# Altium PCB Volta-Interface.PcbDoc (part 1 of 2)
Units mm, origin at the board's own origin, x right, y up, seen from the top; angles counter-clockwise.
Board outline 90 x 25.5 mm, 4 copper layers (Top Layer, PWR, GND, Bottom Layer), stack 0.97 mm thick; 63 components, 43 nets, 229 pads, 83 vias.
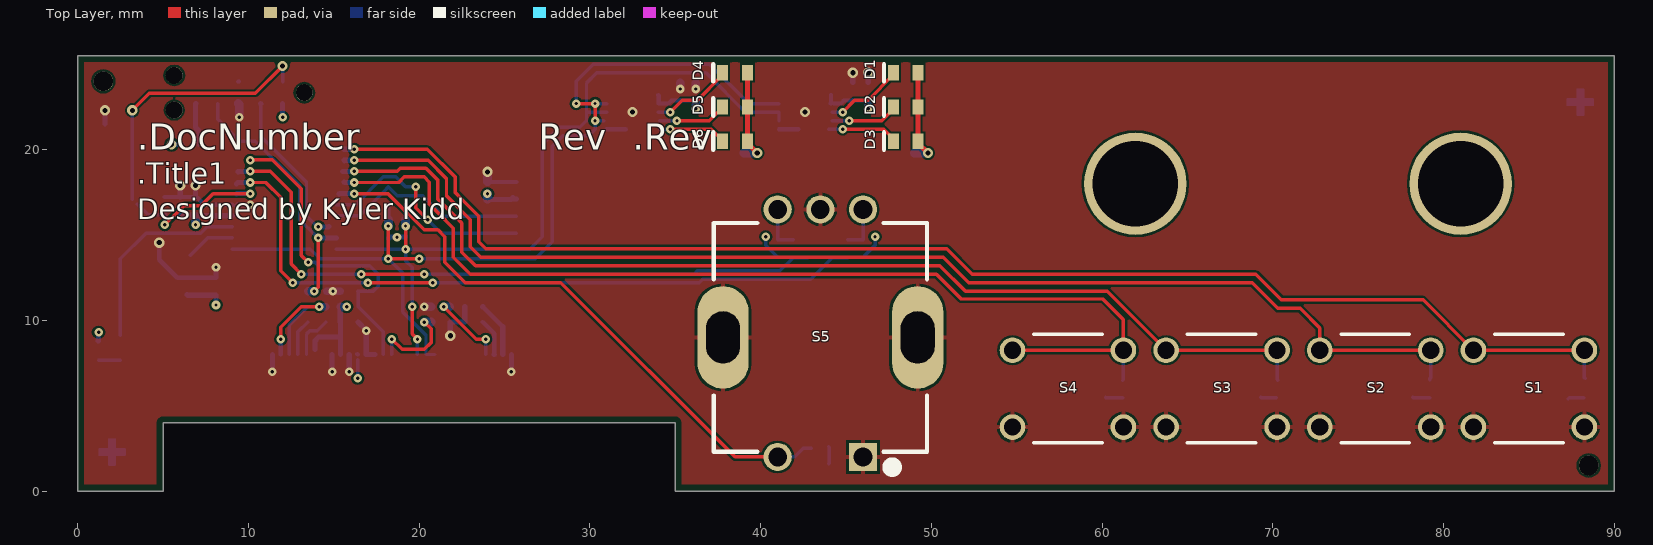
[diagram p0: Top Layer view]
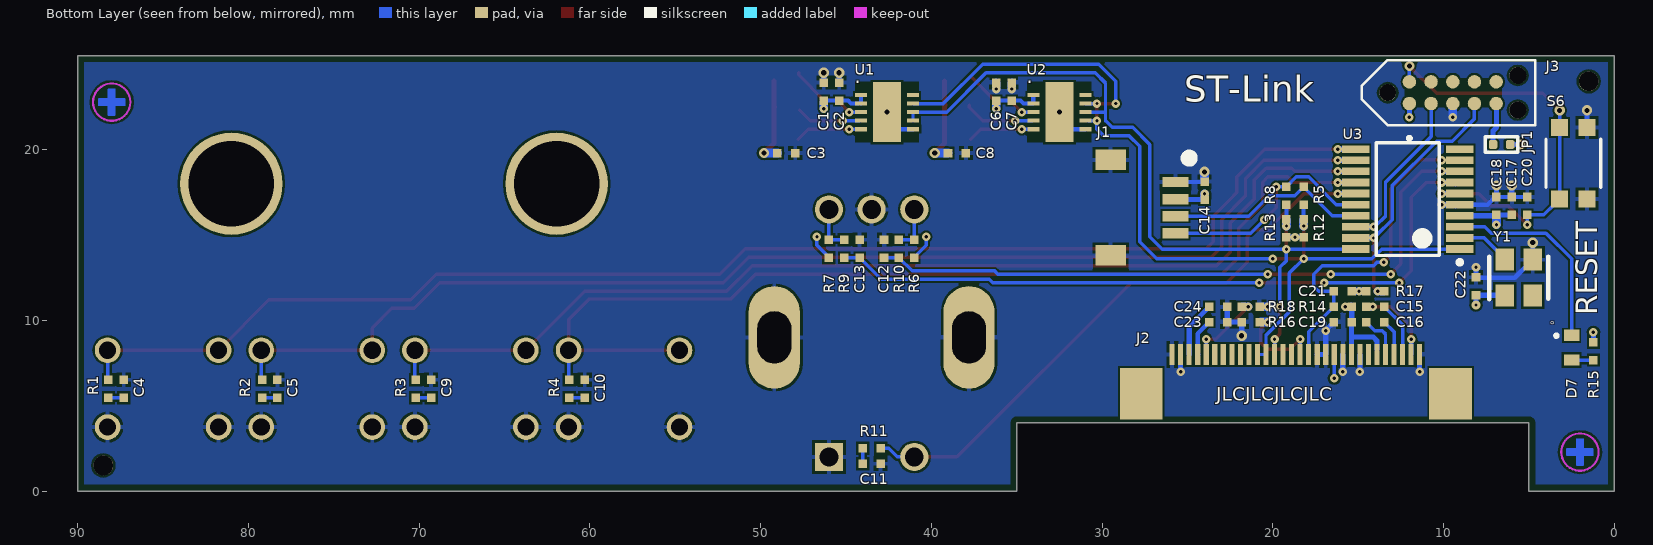
[diagram p1: Bottom Layer view, seen from below]
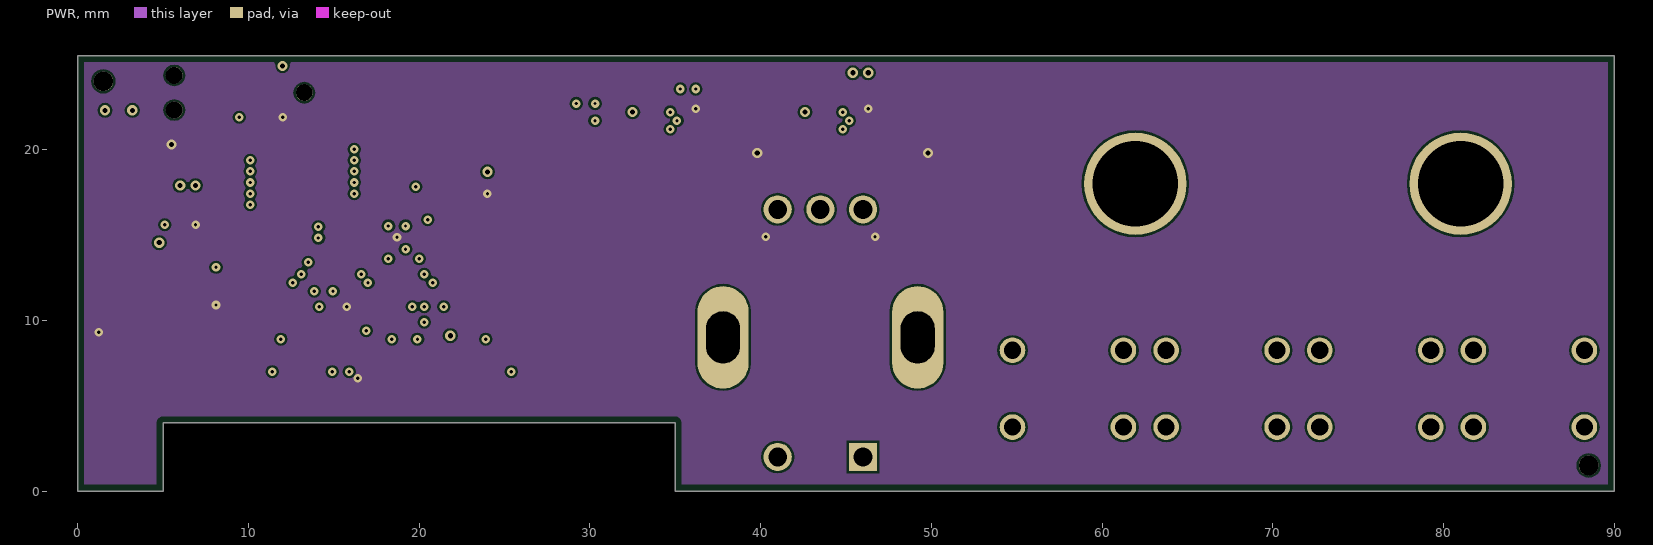
[diagram p2: PWR]
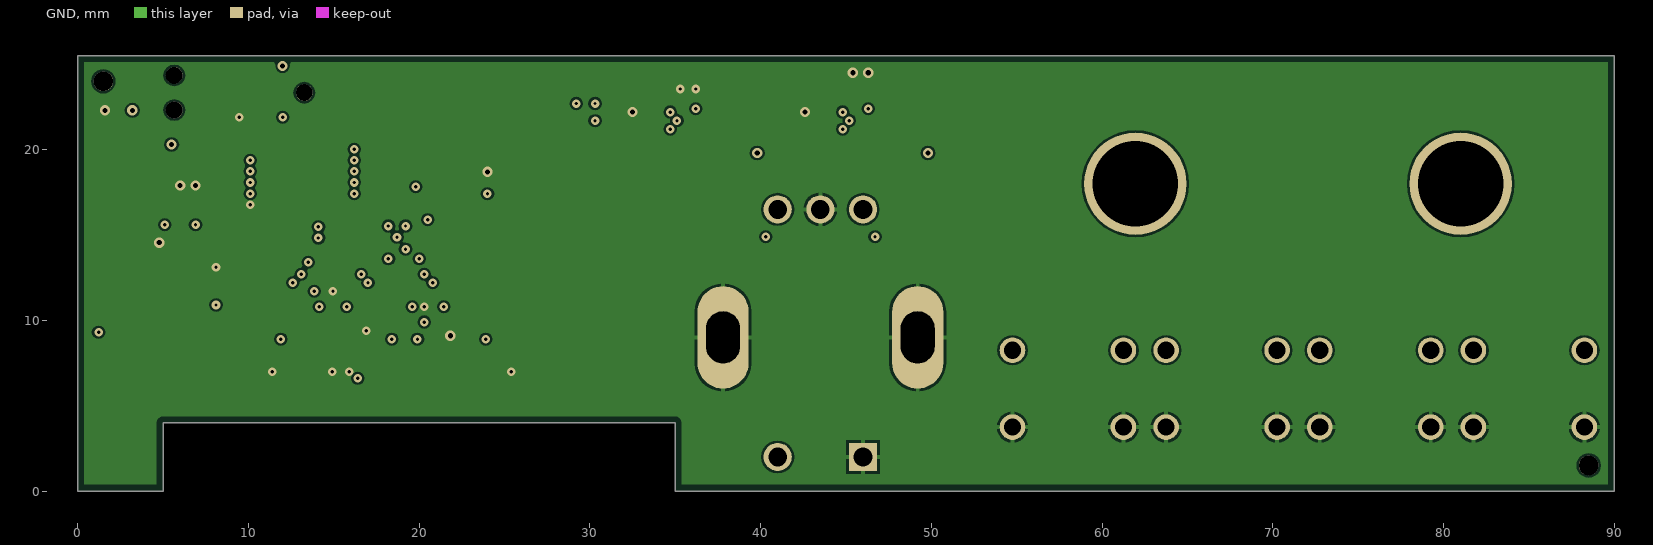
[diagram p3: GND]
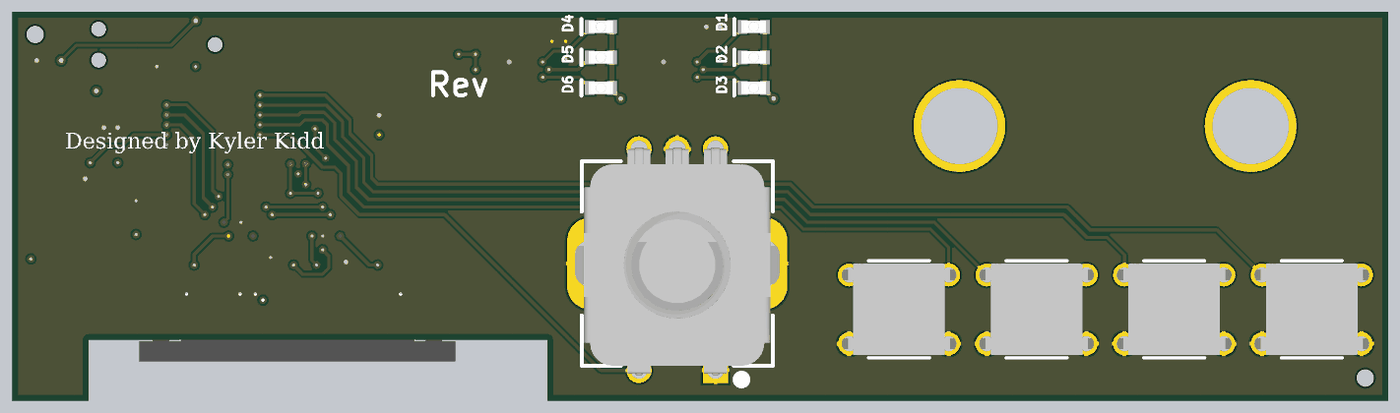
[diagram p5: 3D render of the assembled board from above, using the file's embedded part models]
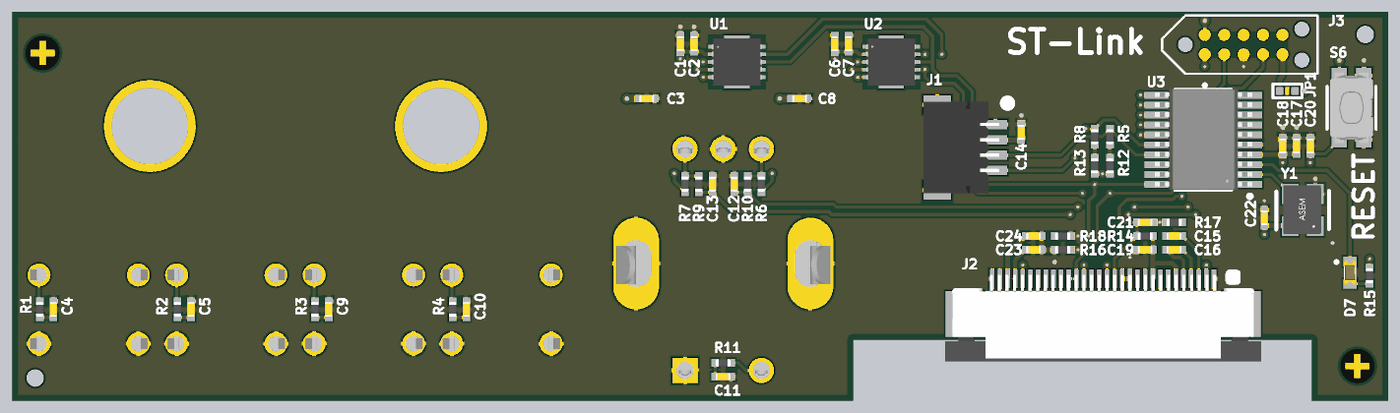
[diagram p6: 3D render of the assembled board from below, using the file's embedded part models]

## Layer stack, top to bottom
Top Solder: solder mask 0.0102, Solder Resist, Dk 3.5
Top Layer: signal copper 0.0356
Prepreg: core 0.2286, FR-4, Dk 4.2
PWR: signal copper 0.0178
Core: core 0.4064, FR-$, Dk 4.2
GND: signal copper 0.0178
Prepreg: core 0.2286, FR-4, Dk 4.2
Bottom Layer: signal copper 0.0356
Bottom Solder: solder mask 0.0102, Solder Resist, Dk 3.5

## Board outline
0,0 0,25.5 90,25.5 90,0 35,0 35,4 5,4 5,0

## Design rules (kind name [scope] priority, off if disabled: settings)
BoardOutlineClearance [All] p1: gap=0.381 ignorepadtopadclearanceinfootprint=FALSE
Clearance "Clearance Polygons" [InPolygon] p1: gap=0.254 ignorepadtopadclearanceinfootprint=FALSE except(0: Arc-Hole Track-Hole SMDPad-Hole THPad-Hole Via-Hole Fill-Hole Poly-Hole Region-Hole Text-Hole)
Clearance [All] p2: gap=0.127 ignorepadtopadclearanceinfootprint=FALSE except(0: Arc-Hole Track-Hole SMDPad-Hole THPad-Hole Via-Hole Fill-Hole Poly-Hole Region-Hole Text-Hole)
ComponentClearance "HM-TRP & UFL" [InComponent('X1') vs InComponent('U1')] p1: gap=0 collisioncheckmode=3 verticalgap=0 showdistances=FALSE
ComponentClearance [All] p2: gap=0.025 collisioncheckmode=3 verticalgap=0.025 showdistances=FALSE
DiffPairsRouting [All] p1: maxlimit=10 minlimit=0.127 mostfreqgap=0.203 toplayer_minwidth=0.127 toplayer_maxwidth=0.381 toplayer_prefwidth=0.203 midlayer1_minwidth=0.127 midlayer1_maxwidth=0.381 midlayer1_prefwidth=0.203 midlayer2_minwidth=0.127 midlayer2_maxwidth=0.381 midlayer2_prefwidth=0.203 bottomlayer_minwidth=0.127 bottomlayer_maxwidth=0.381 bottomlayer_prefwidth=0.203 maxuncoupledlength=12.7
HoleSize [All] p1: absolutevalues=TRUE maxlimit=6.731 minlimit=0.2 maxpercent=80.000 minpercent=20.000
HoleToHoleClearance [All] p1: gap=0.254 allowstackedmicrovias=FALSE
MinimumAnnularRing [All] p1: minimumring=0.102
MinimumSolderMaskSliver [All] p1: minsoldermaskwidth=0
PlaneClearance [All] p1: clearance=0.254
PlaneConnect [All] p1: planeconnectstyle=Relief reliefexpansion=0.102 reliefentries=4 reliefconductorwidth=0.152 reliefairgap=0.152
PolygonConnect "Via connect style" [isVia] p1: connectstyle=Direct reliefconductorwidth=0.254 reliefentries=4 polygonreliefangle="90 Angle" airgapwidth=0.254
PolygonConnect [All] p2: connectstyle=Relief reliefconductorwidth=0.254 reliefentries=4 polygonreliefangle="90 Angle" airgapwidth=0.152
RoutingCorners [All] p1: cornerstyle=45-Degree minsetback=1.25 maxsetback=1.25
RoutingVias [All] p1: holewidth=0.305 width=0.559 viastyle="Through Hole" minholewidth=0.254 minwidth=0.457 maxholewidth=2.54 maxwidth=2.896
SilkToSilkClearance [All] p1: silktosilkclearance=0
SilkToSolderMaskClearance [IsPad] p1: minsilkscreentomaskgap=0.025 clearancetoexposedcopper=TRUE
SolderMaskExpansion [All] p1: expansion=0.064
Width GND [InNet('GND')] p1: maxlimit=0.762 minlimit=0.254 preferedwidth=0.508
Width Power [InNetClass('Power')] p2: maxlimit=1.016 minlimit=0.508 preferedwidth=0.762
Width 3V3 [InNetClass('3V3')] p3: maxlimit=0.762 minlimit=0.254 preferedwidth=0.508
Width [All] p4: maxlimit=10.16 minlimit=0.152 preferedwidth=0.203
20 further rules are at their usual default settings.

## Classes and differential pairs
component class -: R5 R6 R7 R8 R14 R15 R16 R17
component class "USB to UART PHY": R1 R2 R3 R4 R11
component class Interface: C1 C2 C3 C4 C5 C6 C7 C8 C9 C10 C11 C12 C13 C14 C15 C16 C17 C18 C19 C20 C21 C22 C23 C24 D7 R9 R10 R18 Y1

## Components (designator, comment, footprint, x,y, rotation, side; value= is the part's Value field where it differs from the comment)
C1 "2.2uF" 0402 46.3,23.4 r270 bottom
C2 "0.1uF" 0402 45.4,23.4 r270 bottom
C3 "2.2uF" 0402 48.5,19.8 r0 bottom
C4 "0.1uF" 0402 87.3,6 r90 bottom
C5 "0.1uF" 0402 78.3,6 r90 bottom
C6 "2.2uF" 0402 36.2,23.4 r270 bottom
C7 "0.1uF" 0402 35.3,23.4 r270 bottom
C8 "2.2uF" 0402 38.5,19.8 r0 bottom
C9 "0.1uF" 0402 69.3,6 r90 bottom
C10 "0.1uF" 0402 60.3,6 r90 bottom
C11 "0.1uF" 0402 43.5,1.6 r0 bottom
C12 "0.01uF" 0402 42.775,14.2 r270 bottom
C13 "0.01uF" 0402 44.2,14.2 r270 bottom
C14 "2.2uF" 0402 24,17.6 r270 bottom
C15 "2.2uF" 0402 14,10.8 r180 bottom
C16 "2.2uF" 0402 14,9.9 r0 bottom
C17 "2.2uF" 0402 6,16.7 r270 bottom
C18 "0.1uF" 0402 6.9,16.7 r270 bottom
C19 "2.2uF" 0402 15.9,9.9 r180 bottom
C20 "0.1uF" 0402 5.1,16.7 r270 bottom
C21 "0.1uF" 0402 15.9,11.7 r0 bottom
C22 "0.01uF" 0402 8.1,12 r270 bottom
C23 "2.2uF" 0402 23.2,9.9 r0 bottom
C24 "10uF" 0402 23.2,10.8 r0 bottom
D1 "XZMOK53W-8" 0603_LED_DOME 48.5,24.5 r180 top
D2 "XZM2ACR53W-8" 0603_LED_DOME 48.5,22.5 r180 top
D3 "XZVG53W-8" 0603_LED_DOME 48.5,20.5 r180 top
D4 "XZMOK53W-8" 0603_LED_DOME 38.5,24.5 r180 top
D5 "XZM2ACR53W-8" 0603_LED_DOME 38.5,22.5 r180 top
D6 "XZVG53W-8" 0603_LED_DOME 38.5,20.5 r180 top
D7 "LED_Red" 0603_LED_Red 2.5,8.4 r90 bottom
J1 "CCSH-W10R-04TR-BK-A" CCSH-W10R-04TR-BK-A 30.4,20 r270 bottom
J2 "ER-CON30HT-1" ER-CON30HT-1 18.65,5 r180 bottom
J3 "TC2050-IDC-NL" TC2050-IDC-NL-FP 12,22.7 r90 bottom
JP1 "Solder Jumper" "SOLDER JUMPER" 6.6,20.3 r180 bottom
R1 "100" 0402 88.2,6 r90 bottom
R2 "100" 0402 79.2,6 r90 bottom
R3 "100" 0402 70.2,6 r90 bottom
R4 "100" 0402 61.2,6 r90 bottom
R5 "DNP" 0402 18.2,17.3 r90 bottom
R6 "10k" 0402 41,14.2 r90 bottom
R7 "10k" 0402 46,14.2 r90 bottom
R8 "DNP" 0402 19.2,17.3 r90 bottom
R9 "10k" 0402 45.1,14.2 r270 bottom
R10 "10k" 0402 41.9,14.2 r270 bottom
R11 "100" 0402 43.5,2.5 r0 bottom
R12 "2.7k" 0402 18.2,15.4 r270 bottom
R13 "2.7k" 0402 19.2,15.4 r270 bottom
R14 "10k" 0402 15.9,10.8 r0 bottom
R15 "1k" 0402 1.221,8.2 r90 bottom
R16 "10k" 0402 21.3,9.9 r0 bottom
R17 "10k" 0402 14,11.7 r0 bottom
R18 "390k" 0402 21.3,10.8 r0 bottom
S1 "B3F-105X" B3F-105X 85,6 r180 top locked
S2 "B3F-105X" B3F-105X 76,6 r180 top locked
S3 "B3F-105X" B3F-105X 67,6 r180 top locked
S4 "B3F-105X" B3F-105X 58,6 r180 top locked
S5 "PEC11R-4115F-S0018" PEC11R-4xxxF-Sxxxx 43.496,9 r180 top locked
S6 "KMR243GLFG" "KMR 2 Series" 2.4,19.2 r270 bottom
U1 "IS31FL3193" DFN-10 42.6,22.2 r180 bottom
U2 "IS31FL3193" DFN-10 32.5,22.2 r180 bottom
U3 "STM32G031F8P6" TSSOP-20 12.1,17.1 r0 bottom locked
Y1 "ASE-10.000MHZ-LC-T" ASE-XXXXX-X-X-X 5.6,12.5 r90 bottom

## Footprints (in the part's own frame and the unit in brackets; to place one, negate y for a bottom-side part, rotate by r counter-clockwise, add the part's x,y. Pads: shape width x height; smd on the part's side, far side on the other; paste and mask are expansions set on the pad)
0402 [mm] "Chip Capacitor; Body 1.0 x 0.5 mm (LxW typ)"
  rect 0.5x0.5 smd mask+0.038: 1(-0.525,0) 2(0.525,0)
  body extent -0.5,-0.25 0.5,0.25, height 0.6
0603_LED_DOME [mm]
  rect 0.65x0.9 smd mask+0.038: 1(-0.725,0) 2(0.725,0)
  silkscreen extent 1.27,-0.51 1.27,0.51, body extent -0.8,-0.4 0.8,0.4, height 0.95
0603_LED_Red [mm]
  rect 0.65x0.9 smd mask+0.038: 1(-0.725,0) 2(0.725,0)
  silkscreen extent 0.64,0.83 0.76,0.95, body extent -0.8,-0.4 0.8,0.4, height 0.6
ASE-XXXXX-X-X-X [mil] "OSC XO x.xxxMHZ CMOS SMD"
  rect 51x43 smd mask+1.5: 1(-41.5,-32.5) 2(41.5,-32.5) 3(41.5,32.5) 4(-41.5,32.5)
  silkscreen extent -50,-68 49,68, body extent -62,-48 64,50, height 34
B3F-105X [mm]
  round 1.5 hole 1: 1(-3.25,2.25) 1(3.25,2.25) 2(-3.25,-2.25) 2(3.25,-2.25)
  silkscreen extent -2,-3.18 2,3.18, body extent -3.85,-3 3.85,3, height 10
CCSH-W10R-04TR-BK-A [mm]
  rect 0.6x1.55 smd: 1(1.9,4.7) 2(2.9,4.7) 3(3.9,4.7) 4(4.9,4.7)
  rect 1.2x1.8 smd: S1(0.6,0.9) S2(6.2,0.9)
  silkscreen extent 0.3,5.3 0.7,5.7, body extent 0.4,0.01 6.4,4.96, height 3.25
DFN-10 [mm]
  rect 0.7x0.25 smd mask+0.038: 1(-1.525,1) 2(-1.525,0.5) 3(-1.525,0) 4(-1.525,-0.5) 5(-1.525,-1) 6(1.525,-1) 7(1.525,-0.5) 8(1.525,0) 9(1.525,0.5) 10(1.525,1)
  rect 1.65x3.5 smd mask+0.038: 11(0,0)
  body extent -1.6,-1.55 1.6,1.55, height 0.81
ER-CON30HT-1 [mm]
  rect 0.3x1.25 smd paste+0: 1(7.25,3) 2(6.75,3) 3(6.25,3) 4(5.75,3) 5(5.25,3) 6(4.75,3) 7(4.25,3) 8(3.75,3) 9(3.25,3) 10(2.75,3) 11(2.25,3) 12(1.75,3) 13(1.25,3) 14(0.75,3) 15(0.25,3) 16(-0.25,3) 17(-0.75,3) 18(-1.25,3) 19(-1.75,3) 20(-2.25,3) 21(-2.75,3) 22(-3.25,3) 23(-3.75,3) 24(-4.25,3) 25(-4.75,3) 26(-5.25,3) 27(-5.75,3) 28(-6.25,3) 29(-6.75,3) 30(-7.25,3)
  rect 2.5x3 smd paste+0: S1(9.06,0.7) S2(-9.06,0.7)
  rrect50% 1x1 on Bottom Overlay: ""(8.5,3.1)
  body extent -10.33,-2.4 10.33,3.25, height 2.2
"KMR 2 Series" [mm]
  rect 1x1 smd: 1(-2.1,0.8) 1(2.1,0.8) 2(-2.1,-0.8) 2(2.1,-0.8)
  silkscreen extent -1.4,-1.6 1.4,1.6, body extent -2.3,-1.4 2.3,1.4, height 1.92
PEC11R-4xxxF-Sxxxx [mm]
  rect 1.65x1.65 hole 1.1: 1(-2.502,7)
  round 1.65 hole 1.1: 2(2.498,7) A(-2.502,-7.5) B(2.498,-7.5) COM(-0.002,-7.5)
  oval 3x6 hole 1.981 slot 3.048 at 90 deg: S1(-5.702,0) S2(5.698,0)
  silkscreen extent -6.25,-6.7 6.25,7.85, body extent -7,-7.6 7,7.3, height 21.6
"SOLDER JUMPER" [mm]
  rrect35% 0.5x0.5 smd mask+0: 1(-0.5,0) 2(0.5,0)
  silkscreen extent -0.95,-0.44 0.95,0.44
TC2050-IDC-NL-FP [mm]
  round 0.787 smd paste-1: 1(0,0) 2(0,-1.27) 3(0,-2.54) 4(0,-3.81) 5(0,-5.08) 6(1.27,-5.08) 7(1.27,-3.81) 8(1.27,-2.54) 9(1.27,-1.27) 10(1.27,0)
  round 0.991 hole 0.991 unplated: ""(-0.38,-6.35) ""(0.635,1.27) ""(1.65,-6.35)
  silkscreen extent -2.13,-7.37 2.54,2.79
TSSOP-20 [mm]
  rect 1.6x0.45 smd mask+0.038: 1(-3.05,2.925) 2(-3.05,2.275) 3(-3.05,1.625) 4(-3.05,0.975) 5(-3.05,0.325) 6(-3.05,-0.325) 7(-3.05,-0.975) 8(-3.05,-1.625) 9(-3.05,-2.275) 10(-3.05,-2.925) 11(3.05,-2.925) 12(3.05,-2.275) 13(3.05,-1.625) 14(3.05,-0.975) 15(3.05,-0.325) 16(3.05,0.325) 17(3.05,0.975) 18(3.05,1.625) 19(3.05,2.275) 20(3.05,2.925)
  silkscreen extent -3.17,-3.3 1.85,3.82, body extent -3.23,-3.33 3.17,3.28, height 1.7

## Part data
C1 C3 C6 C8 C14 C15 C16 C17 C19 C23: library part CAP, "CAP CER 2.2UF 25V X5R 0402", Manufacturer="Murata Electronics", Part Number=GRM155R61E225KE11D, Voltage=25V, ClassName=Interface
C2 C7 C18 C20 C21: library part CAP, "CAP CER 0.1UF 50V X7R 0402", Manufacturer="Taiyo Yuden", Part Number=UMK105B7104KVHF, Voltage=50V, ClassName=Interface
C4 C5 C9 C10 C11: library part CAP, "CAP CER 0.1UF 50V X7R 0402", Manufacturer="Taiyo Yuden", Part Number=GRM155R61E225KE11D, Voltage=50V, ClassName=Interface
C12 C13 C22: library part CAP, "CAP CER 0.01UF 100V X7R 0402", Manufacturer="Taiyo Yuden", Part Number=HMR105B7103MV-F, Voltage=100V, ClassName=Interface
C24: library part CAP, "CAP CER 10UF 10V X5R 0402", Manufacturer="Samsung Electro-Mechanics", Part Number=CL05A106MP8NUB8, Voltage=10V, ClassName=Interface
D1 D4: library part LED, "LED ORANGE CLEAR CHIP SMD", Manufacturer=SunLED, Part Number=XZMOK53W-8
D2 D5: library part LED, "LED RED CLEAR CHIP SMD", Manufacturer=SunLED, Part Number=XZM2ACR53W-8
D3 D6: library part LED, "LED GREEN CLEAR CHIP SMD", Manufacturer=SunLED, Part Number=XZVG53W-8
D7: "LED HE RD 0603", Manufacturer=Bivar, Part Number=SM0603HCL, ClassName=Interface
J1: "JST 4 PIN SMT CONN", Manufacturer=JST, Part Number=CCSH-W10R-04TR-BK-A
J2: "30 PINS 0.5 PITCH SMD TOP CONTACT CONN", Manufacturer="EastRising Technology", Part Number=ER-CON30HT-1
J3: "CBL PLUG-OF-NAILS 10-PIN", Manufacturer="Tag-Connect LLC", Part Number=TC2050-IDC-NL
JP1: library part SolderJumper_Single, "Solder Jumper Single 0.5mm Pitch"
R1 R2 R3 R4 R11: library part RES, "RES SMD 100 OHM 1% 1/16W 0402", Manufacturer=Panasonic, Part Number=ERJ-2RKF1000X, ClassName="USB to UART PHY"
R5 R8: library part RES, "RES 0 OHM JUMPER 1/16W 0402", Manufacturer="Vishay / Dale", Part Number=CRCW04020000Z0EDC, ClassName=-
R6 R7 R9 R10 R14 R16 R17: library part RES, "RES SMD 10K OHM 1% 1/16W 0402", Manufacturer=Bourns, Part Number=CR0402-FX-1002GLF
  R6 R7 R14 R16 R17: ClassName=-
  R9 R10: ClassName=Interface
R12 R13: library part RES, "RES SMD 2.7K OHM 1% 1/10W 0402", Manufacturer=Panasonic, Part Number=ERJ-2RKF2701X
R15: library part RES, "RES 1K OHM 1% 1/16W 0402", Manufacturer=Bourns, Part Number=CR0402AFX-1001GLF, ClassName=-
R18: library part RES, "RES SMD 390K OHM 1% 1/16W 0402", Manufacturer="Bourns Inc.", Part Number=CR0402-FX-3903GLF, ClassName=Interface
S1 S2 S3 S4: "SWITCH TACTILE SPST-NO 0.05A 24V", Manufacturer="Omron Electronics Inc-EMC Div", Part Number=B3F-105X
S5: library part PEC11R-4xxxF-Sxxxx, "ROTARY ENCODER MECHANICAL XXPPR", Manufacturer=Bourns, Part Number=PEC11R-4115F-S0018
S6: library part "KMR 2 Series", "SWITCH TACTILE SPST-NO 0.01A 32V", Manufacturer=C&K, Part Number=KMR243GLFG
U1 U2: "IC LED DRIVER LINEAR 42MA 10DFN", Manufacturer="Lumissil Microsystems", Part Number=IS31FL3193-DLS2-TR
U3: library part STM32G031FxP6, "IC MCU 32BIT 64KB FLASH 20TSSOP", Manufacturer=STMicroelectronics, Part Number=STM32G031F8P6
Y1: library part ASE-XXXXX-MHZ-X-X, "OSC XO 10.000MHZ CMOS SMD", Manufacturer=Abracon, ClassName=Interface, Part Number=ASE-10.000MHZ-LC-T

## Free pads (board coordinates)
  round 1.152 hole 1.152 unplated: TH(1.5,24) TH(88.5,1.5)
  round 6 hole 5: ""(61.95,18) ""(81,18)

## Via types
v1: diameter 0.5, hole 0.2, Top Layer to Bottom Layer, tented both sides, 68 vias
v2: diameter 0.6, hole 0.3, Top Layer to Bottom Layer, tented both sides, 15 vias

## Nets (pads, with @x,y where several pads share a name; then routed paths per layer and width w, separated by ;. In a path a pad name is that pad's centre, name@x,y a point inside that pad or via, vN(x,y) a via of type N, cw(c..) or ccw(c..) an arc to the next point about the centre after c; other vN are vias at no path point)
+3.3V: C1.2 C2.2 C3.2 C6.2 C7.2 C8.2 C14.2 C17.2 C18.2 C19.2 C22.2 D1.1 D2.1 D3.1 D4.1 D5.1 D6.1 J1.2 J2.6 J2.9 J2.11 J3.1 JP1.2 R6.1 R7.1 R12.2 R13.2 R14.1 R15.2 U1.1 U1.2 U2.1 U2.2 U3.4 Y1.4 | length 36.9
  Top Layer w0.305: 39.225,24 39.225,22.625 39.2,22.6 39.225,22.575 39.225,20.375 v2(39.8,19.8) ; D2.1@49.2,22.5 D2.1@49.225,22.525 ; 49.225,24 D2.1@49.225,22.525 ; v2(49.8,19.8) 49.225,20.375 D2.1@49.225,22.5 D2.1@49.225,22.525
  Bottom Layer w0.203: v1(16.4,6.6) J2.11@16.4,7.7 ; v1(40.3,14.9) 40.3,14.4 R6.1@41,13.7 ; R7.1@46.1,13.8 46.7,14.4 v1(46.7,14.9)
  Bottom Layer w0.254: J2.11@16.371,8.029 J2.11@16.4,8 ; U2.1@34,23.2 34.025,23.175 U2.2@34.025,22.7 ; U2.2@34.1,22.7 34.487,22.7 34.491,22.704 34.604,22.704 34.775,22.875 C7.2@35.3,22.875 ; C7.2@35.3,22.9 35.325,22.875 C6.2@36.2,22.875 ; U1.2@44.1,22.7 44.125,22.725 U1.1@44.125,23.2 ; U1.2@44.3,22.7 44.587,22.7 44.591,22.704 44.704,22.704 44.875,22.875 C2.2@45.4,22.875 ; C2.2@45.4,22.9 45.425,22.875 C1.2@46.3,22.875
  Bottom Layer w0.305: R15.2@1.2,8.8 1.221,8.821 v1(1.221,9.3) ; v2(5.5,20.3) JP1.2@6.1,20.3 ; C17.2@6,16.175 6.825,16.175 6.9,16.1 6.925,16.125 U3.4@9.05,16.125 ; Y1.4@6.4,11.5 6.425,11.475 C22.2@8.1,11.475 v1(8.1,10.9) ; v1(12,21.9) J3.1@12,22.7 ; J2.6@13.9,8.3 13.9,8.8 14.119,9.019 15.319,9.019 15.4,9.1 ; C19.2@15.375,9.9 15.375,10.675 R14.1@15.4,10.7 ; J2.9@15.4,8 15.4,9.1 ; C19.2@15.4,10 15.4,9.1 ; R12.2@18.2,14.8 18.275,14.875 v1(18.7,14.875) 19.175,14.875 R13.2@19.2,14.9 ; C14.2@24,17.075 25.375,17.075 J1.2@25.4,17.1 ; J1.2@25.5,17.2 J1.2@25.4,17.1 ; J1.2@25.7,17.1 J1.2@25.4,17.1
  Bottom Layer w0.45: R14.1@15.401,10.801 v1(15.75,10.801)
  Bottom Layer w0.508: v1(6.9,15.6) C18.2@6.9,16.1 ; C14.2@24,17.1 v1(24,17.42) ; v1(36.2,22.4) C6.2@36.2,22.8 ; C8.2@39.025,19.8 v2(39.8,19.8) ; v1(46.3,22.4) C1.2@46.3,22.8 ; C3.2@49,19.8 C3.2@49.025,19.8 v2(49.8,19.8)
BUTTON_A: R1.2 S1.2 U3.11 | length 80.6
  Top Layer w0.203: v1(16.2,20.025) 20.475,20.025 22.1,18.4 22.1,17.5 22.5,17.1 23.5,16.1 23.5,14.6 23.9,14.2 50.9,14.2 52.4,12.7 69,12.7 70.5,11.2 78.8,11.2 S1.2@81.75,8.25 ; S1.2@81.8,8.2 81.85,8.25 S1.2@88.25,8.25
  Bottom Layer w0.203: S1.2@88.25,8.25 88.25,6.65 R1.2@88.3,6.6
  Bottom Layer w0.305: U3.11@15.6,20 15.625,20.025 v1(16.2,20.025)
BUTTON_B: R2.2 S2.2 U3.12 | length 72.4
  Top Layer w0.203: v1(16.2,19.375) 20.525,19.375 21.6,18.3 21.6,17.3 23,15.9 23,14.3 23.2,14.1 23.6,13.7 50.7,13.7 52.2,12.2 68.8,12.2 70.3,10.7 71.6,10.7 72.75,9.55 S2.2@72.75,8.25 S2.2@79.25,8.25
  Bottom Layer w0.203: U3.12@15.6,19.3 U3.12@15.675,19.375 ; R2.2@79.2,6.525 79.2,6.6 79.25,6.65 S2.2@79.25,8.25
  Bottom Layer w0.305: U3.12@15.6,19.4 15.625,19.375 15.675,19.375 v1(16.2,19.375)
BUTTON_C: R3.2 S3.2 U3.13 | length 62.6
  Top Layer w0.203: v1(16.2,18.725) 18.725,18.725 18.9,18.9 20.4,18.9 21.1,18.2 21.1,17.1 22.5,15.7 22.5,14 23.3,13.2 50.5,13.2 52,11.7 60.3,11.7 S3.2@63.75,8.25 ; S3.2@63.8,8.2 63.85,8.25 S3.2@70.25,8.25
  Bottom Layer w0.203: S3.2@70.25,8.25 70.25,6.55 R3.2@70.3,6.5
  Bottom Layer w0.305: U3.13@15.525,18.725 v1(16.2,18.725)
BUTTON_D: R4.2 S4.2 U3.14 | length 61.1
  Top Layer w0.203: v1(16.2,18.075) 18.8,18.075 19.125,18.4 20.3,18.4 20.6,18.1 20.6,16.8 21.1,16.3 22,15.4 22,13.7 23,12.7 50.3,12.7 51.75,11.25 60.05,11.25 61.25,10.05 S4.2@61.25,8.25 S4.2@54.75,8.25
  Bottom Layer w0.203: R4.2@61.2,6.5 61.25,6.55 S4.2@61.25,8.25
  Bottom Layer w0.305: U3.14@15.6,18.1 15.625,18.075 v1(16.2,18.075)
DISP_RST: C21.2 J2.14 R14.2 U3.9 | length 19
  Top Layer w0.203: v1@10.1,19.4 11.4,19.4 13.1,17.7 13.1,13.8 v1(13.5,13.4)
  Bottom Layer w0.203: v1@13.4,13.5 v1(13.5,13.4) 13.9,13.4 14.1,13.2 17.1,13.2 17.6,12.7 17.6,12 17.3,11.7 C21.2@16.425,11.7 ; C21.2@16.4,11.7 16.425,11.675 R14.2@16.425,10.8 17.9,9.325 J2.14@17.9,8
  other v1: 10.1,19.375
ENC_A: C13.2 R9.2 U3.7 | length 41.5
  Top Layer w0.203: v1(10.1,18.075) 11.025,18.075 11.9,17.2 11.9,12.9 v1(12.6,12.2) v1@12.7,12.2 ; v1(17,12.2) v1(20.8,12.2)
  Bottom Layer w0.203: v1@12.621,12.221 v1(12.6,12.2) v1(17,12.2) ; v1(20.8,12.2) 36.4,12.2 36.6,12.4 42.925,12.4 C13.2@44.2,13.675 R9.2@45.1,13.675
  Bottom Layer w0.305: U3.7@9.3,18 9.375,18.075 v1(10.1,18.075)
ENC_B: C12.2 R10.2 U3.8 | length 38.6
  Top Layer w0.203: v1(10.1,18.725) 11.275,18.725 12.5,17.5 12.5,13.3 v1(13.1,12.7) ; v1@16.7,12.7 v1(20.3,12.7)
  Bottom Layer w0.203: v1(13.1,12.7) v1(16.6,12.7) ; v1(20.3,12.7) 36.1,12.7 36.3,12.9 41.125,12.9 R10.2@41.9,13.675 C12.2@42.775,13.675
  Bottom Layer w0.305: U3.8@9.4,18.7 9.425,18.725 v1(10.1,18.725)
ENC_SW: R11.1 S5.2 U3.15 | length 35.2
  Top Layer w0.203: v1(16.2,17.425) 18.175,17.425 20.3,15.3 21.1,15.3 21.5,14.9 21.5,13.4 22.7,12.2 28.3,12.2 38.5,2 S5.2@40.998,2
  Bottom Layer w0.203: S5.2@40.998,2 42,2 42.5,2.5 R11.1@42.975,2.5
  Bottom Layer w0.305: U3.15@15.3,17.4 15.325,17.425 v1(16.2,17.425)
EXT_SCL: J1.4 R8.2 U3.16 | length 13.3
  Top Layer w0.203: v1(19.8,17.825) 19.8,16.6 v1(20.5,15.9) ; v1@20.527,15.927 v1@20.554,15.9
  Bottom Layer w0.203: U3.16@15.15,16.775 16.275,16.775 17.9,18.4 18.625,18.4 R8.2@19.2,17.825 v1(19.8,17.825) ; v1(20.5,15.9) 21.3,15.1 J1.4@25.7,15.1
EXT_SDA: J1.3 R5.2 U3.17 | length 12
  Bottom Layer w0.203: U3.17@15.15,16.125 16.525,16.125 R5.2@18.1,17.7 ; R5.2@18.087,17.712 R5.2@18.2,17.825 18.725,17.3 20.2,17.3 21.4,16.1 J1.3@25.7,16.1
GND: C1.1 C2.1 C3.1 C4.2 C5.2 C6.1 C7.1 C8.1 C9.2 C10.2 C11.1 C12.1 C13.1 C14.1 C17.1 C18.1 C19.1 C20.1 C21.1 C22.1 C23.1 C24.1 J1.1 J1.S1 J1.S2 J2.1 J2.8 J2.10 J2.12 J2.13 J2.29 J2.30 J3.3 R16.2 R17.2 R18.1 S1.1 S2.1 S3.1 S4.1 S5.1 S5.COM S5.S1 S5.S2 S6.1 U1.6 U1.11 U2.6 U2.11 U3.5 Y1.2 | length 29.9
  Bottom Layer w0.254: v2(4.774,14.55) Y1.2@4.774,13.554 5.829,12.5 C22.1@8.1,12.5 ; C20.1@5.1,17.225 C17.1@6,17.225 C18.1@6.9,17.225 ; C18.1@7,17.2 7.425,16.775 U3.5@9.05,16.775 ; C14.1@24,18.125 24.025,18.1 J1.1@25.7,18.1 ; U2.6@30.975,21.2 U2.11@32.1,21.2 ; U1.6@41.075,21.2 U1.11@42.2,21.2
  Bottom Layer w0.305: S6.1@1.6,21.5 v2(1.6,22.3) ; C17.1@6,17.225 v2(6,17.9) ; C18.1@6.9,17.225 v2(6.9,17.9) ; C22.1@8.1,12.525 v1(8.1,13.1) ; U3.5@9.3,16.7 9.375,16.775 v1(10.1,16.775) ; v1(11.4,7) J2.1@11.4,8 ; v1(14.9,7) J2.8@14.9,8 ; v1(15.9,7) J2.10@15.9,8 ; C19.1@16.425,9.9 16.9,9.425 v1(16.9,9.4) 16.9,8.9 J2.12@16.9,8 J2.13@17.4,8 ; v2(21.825,9.1) R16.2@21.825,9.9 C23.1@22.675,9.9 C24.1@22.675,10.8 ; v1(25.4,7) J2.29@25.4,8 ; C2.1@45.4,23.925 v2(45.4,24.5) ; C1.1@46.3,23.925 v2(46.3,24.5)
  Bottom Layer w0.45: R17.2@14.6,11.7 v1(14.95,11.7) C21.1@15.375,11.7
  Bottom Layer w0.508: J3.3@9.4,22.7 9.46,22.64 v1(9.46,21.9) ; v1(20.3,10.8) R18.1@20.7,10.8 ; C14.1@24,18.125 v2(24,18.7) ; v1(35.3,23.55) C7.1@35.3,23.9 ; v1(36.2,23.55) C6.1@36.2,23.9
  other v2: 32.5,22.2 42.6,22.2
MCU_SCL: J2.18 R8.1 R13.1 U1.7 U1.8 U2.8 U3.20 | length 46.4
  Top Layer w0.203: v1@19.2,14.2 v1(19.2,15.525) ; v1@19.6,10.9 19.6,9.2 v1(19.9,8.9)
  Bottom Layer w0.203: U3.20@15.15,14.175 19.175,14.175 v1@19.2,14.2 ; v1(19.6,10.8) 19.6,13.1 19.2,13.5 v1(19.2,14.175) 26.475,14.175 27.2,14.9 27.2,20.3 28.2,21.3 29.4,21.3 29.7,21.6 29.8,21.7 29.8,22.2 ; J2.18@19.9,8 v1(19.9,8.9) ; U2.8@30.975,22.2 29.8,22.2 ; U1.7@41.075,21.7 U1.8@41.075,22.175 ; U1.8@41.075,22.2 39.1,22.2 36.8,24.5 30.4,24.5 29.8,23.9 29.8,22.2
  Bottom Layer w0.254: R13.1@19.2,15.925 R8.1@19.2,16.775
  Bottom Layer w0.508: v1(19.2,15.525) R13.1@19.2,15.9
MCU_SDA: J2.19 J2.20 R5.1 R12.1 U1.9 U2.7 U2.9 U3.1 | length 56.4
  Top Layer w0.203: v1@18.2,15.5 v1(18.2,13.6) v1(20,13.6) ; v1(29.2,22.7) v1(30.3,22.7) v1(30.3,21.7)
  Bottom Layer w0.203: U3.1@9.05,14.175 13.625,14.175 14.2,13.6 v1(18.2,13.6) 19.029,12.771 19.029,10.489 20.4,9.118 J2.19@20.4,8 J2.20@20.9,8 ; v1(20,13.6) 26.8,13.6 27.8,14.6 27.8,20.2 28.4,20.8 29.9,20.8 30.3,21.2 v1(30.3,21.7) U2.7@30.8,21.7 ; v1(29.2,22.7) 29.2,24 30.2,25 37,25 39.3,22.7 U1.9@41.075,22.7 ; v1(30.3,22.7) U2.9@30.975,22.7
  Bottom Layer w0.254: R12.1@18.2,15.925 R5.1@18.2,16.775
  Bottom Layer w0.508: v1(18.2,15.525) R12.1@18.2,15.9
NetC4_1: C4.1 R1.1 | length 0.9
  Bottom Layer w0.203: C4.1@87.3,5.4 87.375,5.475 R1.1@88.2,5.475
NetC5_1: C5.1 R2.1 | length 1
  Bottom Layer w0.203: C5.1@78.2,5.5 78.225,5.475 C5.1@78.3,5.475 R2.1@79.2,5.475
NetC9_1: C9.1 R3.1 | length 0.9
  Bottom Layer w0.203: C9.1@69.3,5.5 69.325,5.475 R3.1@70.2,5.475
NetC10_1: C10.1 R4.1 | length 1
  Bottom Layer w0.203: C10.1@60.2,5.5 60.225,5.475 C10.1@60.3,5.475 R4.1@61.2,5.475
NetC11_2: C11.2 R11.2 | length 1
  Bottom Layer w0.203: C11.2@44,1.6 44.025,1.625 R11.2@44.025,2.5 44.025,2.575 R11.2@44,2.6
NetC15_1: C15.1 J2.2 | length 4.7
  Top Layer w0.203: v1(11.9,8.9) 11.9,9.6 13.1,10.8 v1(14.15,10.8)
  Bottom Layer w0.254: J2.2@11.9,8 v1(11.9,8.9)
  Bottom Layer w0.45: v1(14.15,10.8) C15.1@14.525,10.8
NetC15_2: C15.2 J2.3 | length 3.2
  Bottom Layer w0.203: J2.3@12.4,8 12.4,9.725 C15.2@13.475,10.8
NetC16_1: C16.1 J2.4 | length 2.1
  Bottom Layer w0.203: J2.4@12.9,8 12.9,9.325 C16.1@13.475,9.9
NetC16_2: C16.2 J2.5 | length 2.6
  Bottom Layer w0.203: J2.5@13.4,8 13.4,9.2 13.6,9.4 14.025,9.4 C16.2@14.525,9.9
NetC23_2: C23.2 J2.27 | length 2.2
  Bottom Layer w0.254: C23.2@23.725,9.9 24.404,9.221 J2.27@24.404,8.004
  Bottom Layer w0.305: J2.27@24.4,8 J2.27@24.404,8.004
NetC24_2: C24.2 J2.28 | length 3.3
  Bottom Layer w0.305: C24.2@23.725,10.8 24.9,9.625 J2.28@24.9,8
NetD1_2: D1.2 U1.3 | length 4.5
  Top Layer w0.203: v1(44.8,22.2) 45.5,22.9 46.3,22.9 47.775,24.375 D1.2@47.775,24.5
  Bottom Layer w0.203: U1.3@44.2,22.2 v1@44.7,22.2
NetD2_2: D2.2 U1.4 | length 3.6
  Top Layer w0.203: v1(45.2,21.7) 47.1,21.7 D2.2@47.7,22.3
  Bottom Layer w0.203: U1.4@44.2,21.7 v1@45.1,21.7
NetD3_2: D3.2 U1.5 | length 3.9
  Top Layer w0.203: v1(44.8,21.2) 47.2,21.2 D3.2@47.8,20.6
  Bottom Layer w0.203: U1.5@44,21.2 U1.5@44.125,21.2 v1@44.7,21.2
NetD4_2: D4.2 U2.3 | length 4.6
  Top Layer w0.203: v1(34.7,22.2) 35.4,22.9 36.3,22.9 D4.2@37.7,24.3
  Bottom Layer w0.203: U2.3@34,22.2 U2.3@34.025,22.2 v1(34.7,22.2)
NetD5_2: D5.2 U2.4 | length 4.1
  Top Layer w0.203: v1(35.1,21.7) 37,21.7 37.775,22.475 D5.2@37.775,22.6
  Bottom Layer w0.203: U2.4@34.1,21.7 v1(35.1,21.7)
NetD6_2: D6.2 U2.5 | length 3.8
  Top Layer w0.203: v1(34.7,21.2) 37.1,21.2 D6.2@37.7,20.6
  Bottom Layer w0.203: U2.5@34.1,21.2 v1(34.7,21.2)
NetD7_1: D7.1 R15.1 | length 1.3
  Bottom Layer w0.203: R15.1@1.221,7.675 D7.1@2.5,7.675
NetD7_2: D7.2 U3.3 | length 11.8
  Bottom Layer w0.203: D7.2@2.5,9.125 2.5,13.6 4,15.1 7.2,15.1 7.575,15.475 U3.3@9.05,15.475
NetJ2_26: J2.26 R18.2 | length 4.5
  Top Layer w0.203: v1@21.4,10.8 v1(21.45,10.8) 23.35,8.9 v1(23.9,8.9)
  Bottom Layer w0.203: J2.26@23.9,8 v1(23.9,8.9)
  Bottom Layer w0.508: v1(21.45,10.8) R18.2@21.8,10.8
NetJ3_5: J3.5 JP1.1 | length 2.4
  Bottom Layer w0.305: J3.5@6.9,22.6 6.9,21.3 7.1,21.1 JP1.1@7.1,20.3 ; J3.5@6.9,22.7 J3.5@6.92,22.7
NetR6_2: R6.2 R10.1 S5.B | length 2.5
  Bottom Layer w0.203: S5.B@40.9,16.3 41,16.2 R6.2@41,14.725 R10.1@41.9,14.725
NetR7_2: R7.2 R9.1 S5.A | length 2.4
  Bottom Layer w0.203: R9.1@45.1,14.725 R7.2@46,14.725 S5.A@46,16.2
NetU3_2: U3.2 Y1.3 | length 2.9
  Bottom Layer w0.203: Y1.3@6.6,13.8 7.625,14.825 U3.2@9.05,14.825
NRST: C20.2 J3.10 S6.2 U3.6 | length 25.2
  Top Layer w0.203: v2(3.2,22.3) 4.2,23.3 10.4,23.3 v2(12,24.9) ; v1@5,15.6 v1@5.05,15.65 ; v1(5.1,15.6) 6.2,16.7 7.2,16.7 7.925,17.425 v1(10.1,17.425) ; v2@12.05,24.85 v2@12.1,24.9
  Bottom Layer w0.203: S6.2@3.2,17.1 S6.2@3.2,21.3 v2(3.2,22.3) ; S6.2@3.5,16.8 4.125,16.175 C20.2@5.1,16.175 v1(5.1,15.6) ; J3.10@12,23.97 v2(12,24.9)
  Bottom Layer w0.305: C20.2@5.1,16.175 C20.2@5.1,16.2 ; U3.6@9.3,17.4 9.325,17.425 v1(10.1,17.425)
SA0: J2.15 R16.1 | length 5.4
  Top Layer w0.203: v1(18.4,8.9) 19,8.3 20.3,8.3 20.7,8.7 20.7,9.5 v1(20.3,9.9)
  Bottom Layer w0.203: J2.15@18.4,8 v1(18.4,8.9)
  Bottom Layer w0.508: v1(20.3,9.9) R16.1@20.7,9.9
SWCLK: J3.4 R17.1 U3.19 | length 15.6
  Top Layer w0.203: v1(13.85,11.7) 14.1,11.95 v1(14.1,14.825)
  Bottom Layer w0.203: J3.4@8.19,22.7 8.19,21.81 9.5,20.5 10.4,20.5 13,17.9 13,15.898 13.902,14.996 14.004,14.996 14.1,14.9 v1(14.1,14.825)
  Bottom Layer w0.305: v1@14.1,14.9 14.175,14.825 U3.19@15.15,14.825
  Bottom Layer w0.508: R17.1@13.5,11.7 v1(13.85,11.7)
SWDIO: J3.2 U3.18 | length 9.3
  Bottom Layer w0.203: J3.2@10.73,22.7 10.73,22.67 10.73,20.77 13.4,18.1 13.4,16.1 14,15.5 v1@14.1,15.5
  Bottom Layer w0.305: J3.2@10.7,22.7 J3.2@10.73,22.67 ; v1(14.1,15.475) 14.675,15.475 U3.18@14.7,15.5
SWO: J3.6
pads on no net: J2. J2.7 J2.16 J2.17 J2.21 J2.22 J2.23 J2.24 J2.25 J2.S1 J2.S2 J3. J3.7 J3.8 J3.9 U1.10 U2.10 U3.10 Y1.1
copper on no net: | length 0.1
  Bottom Layer w0.203: 9.37,23.97 9.4,24 ; 9.46,23.97 9.46,24

## Polygon pours and split planes (outlines as drawn)
+3.3V on PWR "+3.3V-PWR" (solid, remove dead copper, pour order 58): 0,0 0,25.5 90,25.5 90,0 35,0 35,4 5,4 5,0
GND on GND "GND PLANE" (solid, remove dead copper, pour order 59): 0,0 0,25.5 90,25.5 90,0 35,0 35,4 5,4 5,0
GND on Top Layer "Top_GND" (solid, remove dead copper, pour order 56): 0,0 90,0 90,26 0,26
GND on Bottom Layer "Bottom_GND" (solid, remove dead copper, pour order 57): 0,0 90,0 90,26 0,26

## Keep-outs
Bottom Layer:
  circle w0.127: c88.01,22.782 r1.092
  circle w0.127: c2.01,2.282 r1.092

## Other copper
Bottom Layer:
  pour cut-out: 6.55,24.2 6.55,22.45 12.3,22.45 12.3,24.2
  pour cut-out: 34.4,20.4 34.4,24 30.6,24 30.6,20.4
  pour cut-out: 44.5,20.4 44.5,24 40.7,24 40.7,20.4
  region: 88.22,23.563 88.228,23.544 88.228,23 88.772,23 88.791,22.992 88.799,22.973 88.799,22.592 88.791,22.572 88.772,22.564 88.228,22.564 88.228,22.02 88.22,22.001 88.201,21.993 87.82,21.993 87.8,22.001 87.792,22.02 87.792,22.564 87.248,22.564 87.229,22.572 87.221,22.592 87.221,22.973 87.229,22.992 87.248,23 87.796,23 87.792,23.544 87.796,23.554 87.8,23.563 87.81,23.567 87.819,23.571 87.82,23.571 88.201,23.571
  region: 2.22,3.063 2.228,3.044 2.228,2.5 2.772,2.5 2.791,2.492 2.799,2.473 2.799,2.092 2.791,2.072 2.772,2.064 2.228,2.064 2.228,1.52 2.22,1.501 2.201,1.493 1.82,1.493 1.8,1.501 1.792,1.52 1.792,2.064 1.248,2.064 1.229,2.072 1.221,2.092 1.221,2.473 1.229,2.492 1.248,2.5 1.796,2.5 1.792,3.044 1.796,3.054 1.8,3.063 1.81,3.067 1.819,3.072 1.819,3.071 1.82,3.072 2.201,3.072

## Silkscreen, mask and mechanical layers (free items; w line width, h text height)
Top Overlay:
  text ".DocNumber" at 3.5,20 h1.52
  text "Rev" at 27,20 h1.52
  text ".Rev" at 32.5,20 h1.52
  text ".Title1" at 3.5,18 h1.22
  text "Designed by Kyler Kidd" at 3.5,15.5 h2.03
Bottom Overlay:
  text "ST-Link" at 25.2,22.8 h1.52
  text "RESET" at 1,10.3 h1.27 r270
  text "JLCJLCJLCJLC" at 23.3,5.3 h0.8
Bottom Solder:
  circle w0.254: c88.014,22.782 r1.001
  circle w0.254: c2.014,2.282 r1.001
  rectangle: 87.064,22.357 88.939,23.232
  rectangle: 87.239,23.207 88.789,23.582
  rectangle: 87.589,21.757 88.389,23.807
  rectangle: 87.214,21.982 88.789,22.382
  rectangle: 1.214,1.482 2.789,1.882
  rectangle: 1.589,1.257 2.389,3.307
  rectangle: 1.239,2.707 2.789,3.082
  rectangle: 1.064,1.857 2.939,2.732
  region: 88.22,23.563 88.228,23.544 88.228,23 88.772,23 88.791,22.992 88.799,22.973 88.799,22.592 88.791,22.572 88.772,22.564 88.228,22.564 88.228,22.02 88.22,22.001 88.201,21.993 87.82,21.993 87.8,22.001 87.792,22.02 87.792,22.564 87.248,22.564 87.229,22.572 87.221,22.592 87.221,22.973 87.229,22.992 87.248,23 87.796,23 87.792,23.544 87.796,23.554 87.8,23.563 87.81,23.567 87.819,23.571 87.82,23.571 88.201,23.571
  region: 2.22,3.063 2.228,3.044 2.228,2.5 2.772,2.5 2.791,2.492 2.799,2.473 2.799,2.092 2.791,2.072 2.772,2.064 2.228,2.064 2.228,1.52 2.22,1.501 2.201,1.493 1.82,1.493 1.8,1.501 1.792,1.52 1.792,2.064 1.248,2.064 1.229,2.072 1.221,2.092 1.221,2.473 1.229,2.492 1.248,2.5 1.796,2.5 1.792,3.044 1.796,3.054 1.8,3.063 1.81,3.067 1.819,3.072 1.819,3.071 1.82,3.072 2.201,3.072
Mechanical 1:
  lines w0.254: 58.862,12.452 cw(c61.95,18) 65.038,12.452 ; 58.875,12.45 61.95,12.45 65.025,12.45 ; 77.912,12.452 cw(c81,18) 84.088,12.452 ; 77.925,12.45 81,12.45 84.075,12.45 ; 0,0 5,0 5,4 35,4 35,0 90,0 90,25.5 0,25.5 0,0
Mechanical 15:
  lines w0.2: 60.95,18 62.95,18 ; 61.95,17 61.95,19 ; 80,18 82,18 ; 81,17 81,19
ASSY_TOP:
  drawing of 322 lines, arcs and shapes, not listed
  text "SH" at 401.173,299.933 h2.54
  text "DWG NO" at 326.021,299.518 h2.54
  text ".DocNumber" at 342.672,296.678 h3.05
  text "2" at -196.323,296.19 h5.08
  text "4" at 19.75,296.19 h5.08
  text "8" at 444.108,296.19 h5.08
  text "1" at -304.051,296.03 h5.08
  text "3" at -88.329,296.03 h5.08
  text "5" at 127.749,296.03 h5.08
  text "6" at 235.696,296.03 h5.08
  text "1" at 406.172,295.662 h3.05
  text "REVISION HISTORY" at 352.324,289.283 h2.54
  text "REV" at 327.94,283.216 h2.54
  text "DESCRIPTION" at 373.66,283.216 h2.54
  text "DATE" at 432.08,283.216 h2.54
  text "APPROVED" at 462.56,283.216 h2.54
  text ".Hist1Rev" at 328.845,278.615 h2.54
  text ".Hist1Desc" at 340.64,278.136 h2.54
  text ".Hist1Date" at 424.46,278.136 h2.54
  text ".Hist1Appr" at 454.94,278.136 h2.54
  text "NOTES" at -317.22,276.86 h10.16
  text ".Hist2Rev" at 328.845,273.002 h2.54
  text ".Hist2Desc" at 340.64,272.522 h2.54
  text ".Hist2Date" at 424.46,272.522 h2.54
  text ".Hist2Appr" at 454.94,272.522 h2.54
  text "1. DIMENSIONING AND TOLERANCING PER ASME Y14.5M-1994" at -317.22,269.24 h5.08
  text ".Hist3Rev" at 328.845,267.414 h2.54
  text ".Hist3Desc" at 340.64,266.934 h2.54
  text ".Hist3Date" at 424.46,266.934 h2.54
  text ".Hist3Appr" at 454.94,266.934 h2.54
  text "2. INTERPRET PER ASME Y14.100M" at -317.22,261.62 h5.08
  text "3. ASSEMBLE PER IPC-A-610, CLASS 2" at -317.22,254 h5.08
  text "4. SOLDER PER J-STD-001, CLASS 2. USE LEAD-FREE SOLDER" at -317.22,246.38 h5.08
  text "5. ALL PARTS SHOWN MAY NOT BE INSTALLED. FOR SCHEMATIC, SEE SEPARATE PARTS LIST" at -317.22,238.76 h5.08
  text "A" at -346.12,232.525 h5.08
  text "A" at 492.167,232.525 h5.08
  text "6. DATA INCLUDED IN PARENTHESIS IS FOR REFERENCE ONLY" at -317.22,231.14 h5.08
  text "7. FOR COMPONENTS WITH REFERENCE DESIGNATORS, REFER TO PARTS LIST BY REFERENCE DESIGNATION" at -317.22,223.52 h5.08
  text "8. ELECTROSTATIC DISCHARGE CONTROL PROGRAM FOR PROTECTION OF ELECTRICAL AND ELECTRONIC" at -317.22,215.9 h5.08
  text "PARTS, ASSEMBLIES, AND EQUIPMENT SHALL BE PER IPC-610 OR BETTER" at -317.22,208.28 h5.08
  text "9. THE PCB MATERIAL MANUFACTURER'S RECOMMENDATIONS FOR PCB MATERIAL STORAGE, PRE-PROCESS" at -317.22,200.66 h5.08
  text "BAKEOUT, PROCESSING AND MATERIAL HANDLING SHALL BE STRICTLY FOLLOWED DURING ALL ASSEMBLY" at -312.14,193.04 h5.08
  text "PROCESSES. DEVIATION FROM THESE STANDARDS REQUIRES WRITTEN AUTHORIZATION FROM OCEAN OPTICS, INC" at -312.14,185.42 h5.08
  text "10. MARK LAST 3 DIGITS OF DRAWING NUMBER (-XXX) IN A CLEAR AND LEGIBLE MANNER USING POLYIMIDE BRADY LABEL" at -319.76,177.8 h5.08
  text "11. MARK DOCUMENT REVISION IN A CLEAR AND LEGIBLE MANNER USING POLYIMIDE BRADY LABEL" at -319.76,170.18 h5.08
  text "12. ALL PROCESSES AND PROCEDURES SHALL BE ROHS COMPLIANT" at -319.76,162.56 h5.08
  text "13. COMPLETED CIRCUIT CARD ASSEMBLIES SHALL BE PACKAGED INDIVIDUALLY" at -319.76,154.94 h5.08
  text "IN STATIC SHIELDING PACKAGING IN ACCORDANCE WITH ANSI/ESD-S-20.20" at -312.14,147.32 h5.08
  text "B" at -346.17,92.665 h5.08
  text "B" at 492.117,92.665 h5.08
  text "Dimensions in mm" at 374,-38 h6.35
  text "Scale  3:1" at 269,-42 h12.7
  text "C" at -345.585,-46.808 h5.08
  text "C" at 492.701,-46.808 h5.08
  text "SEE SEPARATE PARTS LIST." at 223.546,-165.602 h10.16
  text "DFTG" at 264.44,-174.521 h2.54
  text ".NameDftg" at 277.648,-174.521 h2.54
  text ".DateDftg" at 317.272,-174.521 h2.54
  text "UNLESS OTHERWISE SPECIFIED," at 209.576,-178.839 h2.03
  text "MATERIAL:" at 146.406,-179.064 h2.54
  text "ENG" at 264.44,-181.125 h2.54
  text ".NameEng" at 277.648,-181.125 h2.54
  text ".DateEng" at 317.272,-181.125 h2.54
  text "INCHES" at 245.644,-182.366 h2.03
  text "DIMENSIONS ARE IN" at 209.576,-182.395 h2.03
  text "D" at -345.838,-186.507 h5.08
  text "D" at 492.449,-186.507 h5.08
  text "MECH" at 264.44,-186.713 h2.54
  text "*" at 277.648,-187.221 h2.54
  text "*" at 317.272,-187.221 h2.54
  text "TITLE:" at 356.25,-189.253 h2.54
  text "TOLERANCES:" at 209.576,-190.269 h2.54
  text "SEE NOTES" at 148.235,-192.272 h2.54
  text "MFG" at 264.44,-193.317 h2.54
  text "*" at 277.648,-193.317 h2.54
  text "*" at 317.272,-193.825 h2.54
  text ".X +/- 0.1" at 210.592,-194.841 h2.54
  text ".XX +/- 0.01" at 210.592,-197.889 h2.54
  text ".TitleCCA" at 362.865,-198.241 h5.59
  text ".XXX +/- 0.001" at 210.592,-200.937 h2.54
  text ".Title0" at 382.41,-207.73 h5.59
  text "THIRD ANGLE PROJECTION" at 147.854,-212.491 h2.54
  text "ALL SHEETS ARE THE" at 214.148,-216.589 h2.54
  text ".Title1" at 367.31,-217.17 h5.59
  text "SAME REVISION STATUS" at 211.799,-221.161 h2.54
  text "SIZE" at 356.388,-224.305 h2.54
  text "DRAWING NUMBER" at 366.04,-224.305 h2.54
  text "REV" at 473.112,-225.855 h3.05
  text "D" at 356.43,-232.146 h5.08
  text ".DocNumber" at 366.04,-232.404 h6.6
  text ".Rev" at 472.72,-232.404 h5.08
  text "1" at 457.48,-237.484 h2.54
  text "2" at 472.72,-237.484 h2.54
  text "1:1" at 369.85,-237.738 h2.54
  text "SCALE" at 355.824,-237.913 h2.54
  text "SHEET   OF" at 441.731,-238.128 h2.54
  text "8" at 449.606,-248.66 h5.08
  text "1" at -303.885,-248.914 h5.08
  text "2" at -196.323,-249.908 h5.08
  text "4" at 19.75,-249.908 h5.08
  text "3" at -88.329,-250.068 h5.08
  text "5" at 127.749,-250.068 h5.08
  text "6" at 235.696,-250.068 h5.08
  text "7" at 343.67,-250.068 h5.08
Drill Drawing:
  lines w0.381: -277.048,-180.334 -277.048,-172.714 ; -259.323,-180.334 -259.323,-172.714 ; -225.145,-180.334 -225.145,-172.714 ; -212.296,-180.334 -212.296,-172.714 ; -291.04,-180.334 -192.514,-180.334 -192.514,-172.714 -291.04,-172.714 -291.04,-180.334 ; -291.04,-176.524 -192.514,-176.524 -291.04,-176.524
  text "Symbol" at -288.754,-175.381 h1.83
  text "Hit Count" at -275.905,-175.381 h1.83
  text "Finished Hole Size" at -258.18,-175.381 h1.83
  text "Plated" at -224.002,-175.381 h1.83
  text "Hole Type" at -211.153,-175.381 h1.83
ASSY_BOT:
  lines w0.198: -327.242,282.708 -167.527,282.708 ; -327.242,287.788 -167.527,287.788 ; -294.146,282.835 -294.141,293.373 ; -261.507,282.327 -261.507,293.376 ; -180.227,276.993 -180.227,293.376 ; -352.78,-252.527 -352.78,306.076 ; -352.78,-252.527 510.653,-252.527 ; -352.78,-252.527 510.653,-252.527 ; -352.78,-252.527 -352.78,306.076 ; -352.78,306.076 510.653,306.076 ; -352.78,306.076 510.653,306.076 ; 510.653,-252.527 510.653,306.076 ; 510.653,-252.527 510.653,306.076
  lines w0.599: -346.612,-106.677 -327.562,-106.677 ; -346.612,166.372 -327.562,166.372 ; -327.562,293.371 -327.562,-240.027 ; -327.562,-220.977 -197.514,-220.977 ; -312.551,-233.677 -312.551,-220.977 ; -283.112,-240.027 -283.112,-233.677 ; -245.012,-249.552 -245.012,-240.027 ; -197.515,-239.897 -197.515,-221.358 ; -167.649,276.358 -167.649,293.373 ; -137.063,-249.552 -137.063,-240.027 ; -137.063,293.371 -137.063,302.896 ; -29.113,-249.552 -29.113,-240.027 ; -29.113,293.371 -29.113,302.896 ; 186.787,-249.552 186.787,-240.027 ; 186.787,293.371 186.787,302.896 ; 294.737,-249.552 294.737,-240.027 ; 402.686,-249.552 402.686,-240.027 ; 402.686,293.371 402.686,302.896 ; 485.236,166.372 504.286,166.372 ; 485.236,293.373 -327.575,293.373 ; 485.871,-106.677 504.921,-106.677 ; -327.575,293.373 -327.575,272.896 -327.575,293.373 ; -327.562,-240.027 485.236,-240.027 ; -327.562,-240.027 485.236,-240.027 ; -327.562,-240.027 485.236,-240.027 ; -327.562,-240.027 485.236,-240.027 ; -327.562,-233.677 -197.514,-233.677 ; -327.562,-233.677 -197.514,-233.677 ; -327.562,-233.677 -197.514,-233.677 ; -327.562,-233.677 -197.514,-233.677 ; -255.172,293.371 -255.172,303.023 ; -255.172,293.371 -255.172,303.023 ; -255.172,293.371 -255.172,303.023 ; -255.172,293.371 -255.172,303.023 ; -255.172,293.371 -255.172,303.023 ; -255.172,293.371 -255.172,303.023 ; -255.172,293.371 -255.172,303.023 ; -255.172,293.371 -255.172,303.023 ; -255.172,303.023 -167.629,303.023 ; -255.172,303.023 -172.622,303.023 -255.172,303.023 ; -255.172,303.023 -167.629,303.023 ; -242.472,293.371 -242.472,303.023 ; -242.472,293.371 -242.472,303.023 ; -242.472,293.371 -242.472,303.023 ; -242.472,293.371 -242.472,303.023 ; -167.629,303.023 -167.629,293.371 -167.629,303.023 ; 294.737,293.371 294.737,302.896 ; 294.737,293.371 294.737,302.896 ; 294.737,293.371 294.737,302.896 ; 294.737,293.371 294.737,302.896 ; 485.236,-240.027 485.236,285.548 485.236,-240.027 ; 485.236,-240.027 485.236,293.371 ; 485.236,-240.027 485.236,293.371 ; 485.236,-240.027 485.236,293.371 ; -337.722,25.91 -337.722,27.434 -332.642,27.434 -332.642,29.212 -327.562,26.672 -332.642,24.132 -332.642,25.91 -337.722,25.91 ; 76.297,-245.107 78.837,-240.027 81.377,-245.107 79.599,-245.107 79.599,-250.187 78.075,-250.187 78.075,-245.107 76.297,-245.107 ; 76.297,298.451 78.837,293.371 81.377,298.451 79.599,298.451 79.599,303.53 78.075,303.53 78.075,298.451 76.297,298.451 ; 485.236,26.672 490.316,24.132 490.316,25.91 495.396,25.91 495.396,27.434 490.316,27.434 490.316,29.212 485.236,26.672
  text "SH" at -243.3,299.933 h2.54
  text "DWG NO" at -168.148,299.518 h2.54
  text ".DocNumber" at -184.799,296.678 h3.05
  text "8" at -286.235,296.19 h5.08
  text "4" at 138.123,296.19 h5.08
  text "2" at 354.196,296.19 h5.08
  text "6" at -77.823,296.03 h5.08
  text "5" at 30.124,296.03 h5.08
  text "3" at 246.202,296.03 h5.08
  text "3" at 246.202,296.03 h5.08
  text "1" at 461.924,296.03 h5.08
  text "1" at -248.299,295.662 h3.05
  text "REVISION HISTORY" at -194.451,289.283 h2.54
  text "APPROVED" at -304.687,283.216 h2.54
  text "DATE" at -274.207,283.216 h2.54
  text "DESCRIPTION" at -215.787,283.216 h2.54
  text "REV" at -170.067,283.216 h2.54
  text "SEE SHEET 1" at -182.767,278.136 h2.54
  text "A" at -334.294,232.525 h5.08
  text "A" at 503.993,232.525 h5.08
  text "B" at -334.244,92.665 h5.08
  text "B" at 504.043,92.665 h5.08
  text "Scale  3:1" at 317.36,-41.12 h12.7
  text "C" at -334.828,-46.808 h5.08
  text "C" at 503.458,-46.808 h5.08
  text "D" at -334.576,-186.507 h5.08
  text "D" at 503.711,-186.507 h5.08
  text "REV" at -315.239,-225.855 h3.05
  text ".DocNumber" at -203.722,-231.134 h5.08
  text ".Rev" at -314.847,-232.404 h5.08
  text "2" at -314.847,-237.484 h2.54
  text "SHEET 2 OF" at -283.858,-238.128 h2.54
  text "8" at -291.733,-248.66 h5.08
  text "1" at 461.925,-248.914 h5.08
  text "4" at 138.123,-249.908 h5.08
  text "2" at 354.196,-249.908 h5.08
  text "7" at -185.797,-250.068 h5.08
  text "6" at -77.823,-250.068 h5.08
  text "5" at 30.124,-250.068 h5.08
  text "3" at 246.202,-250.068 h5.08